# Altium PCB 底板20160428.PcbDoc (part 4 of 5)
Units mm, origin at the board's own origin, x right, y up, seen from the top; angles counter-clockwise.
Board outline 123.72 x 102.71 mm, 2 copper layers (Top Layer, Bottom Layer); 224 components, 227 nets, 768 pads, 282 vias.
Unrouted connection lines stored in the file: 2.
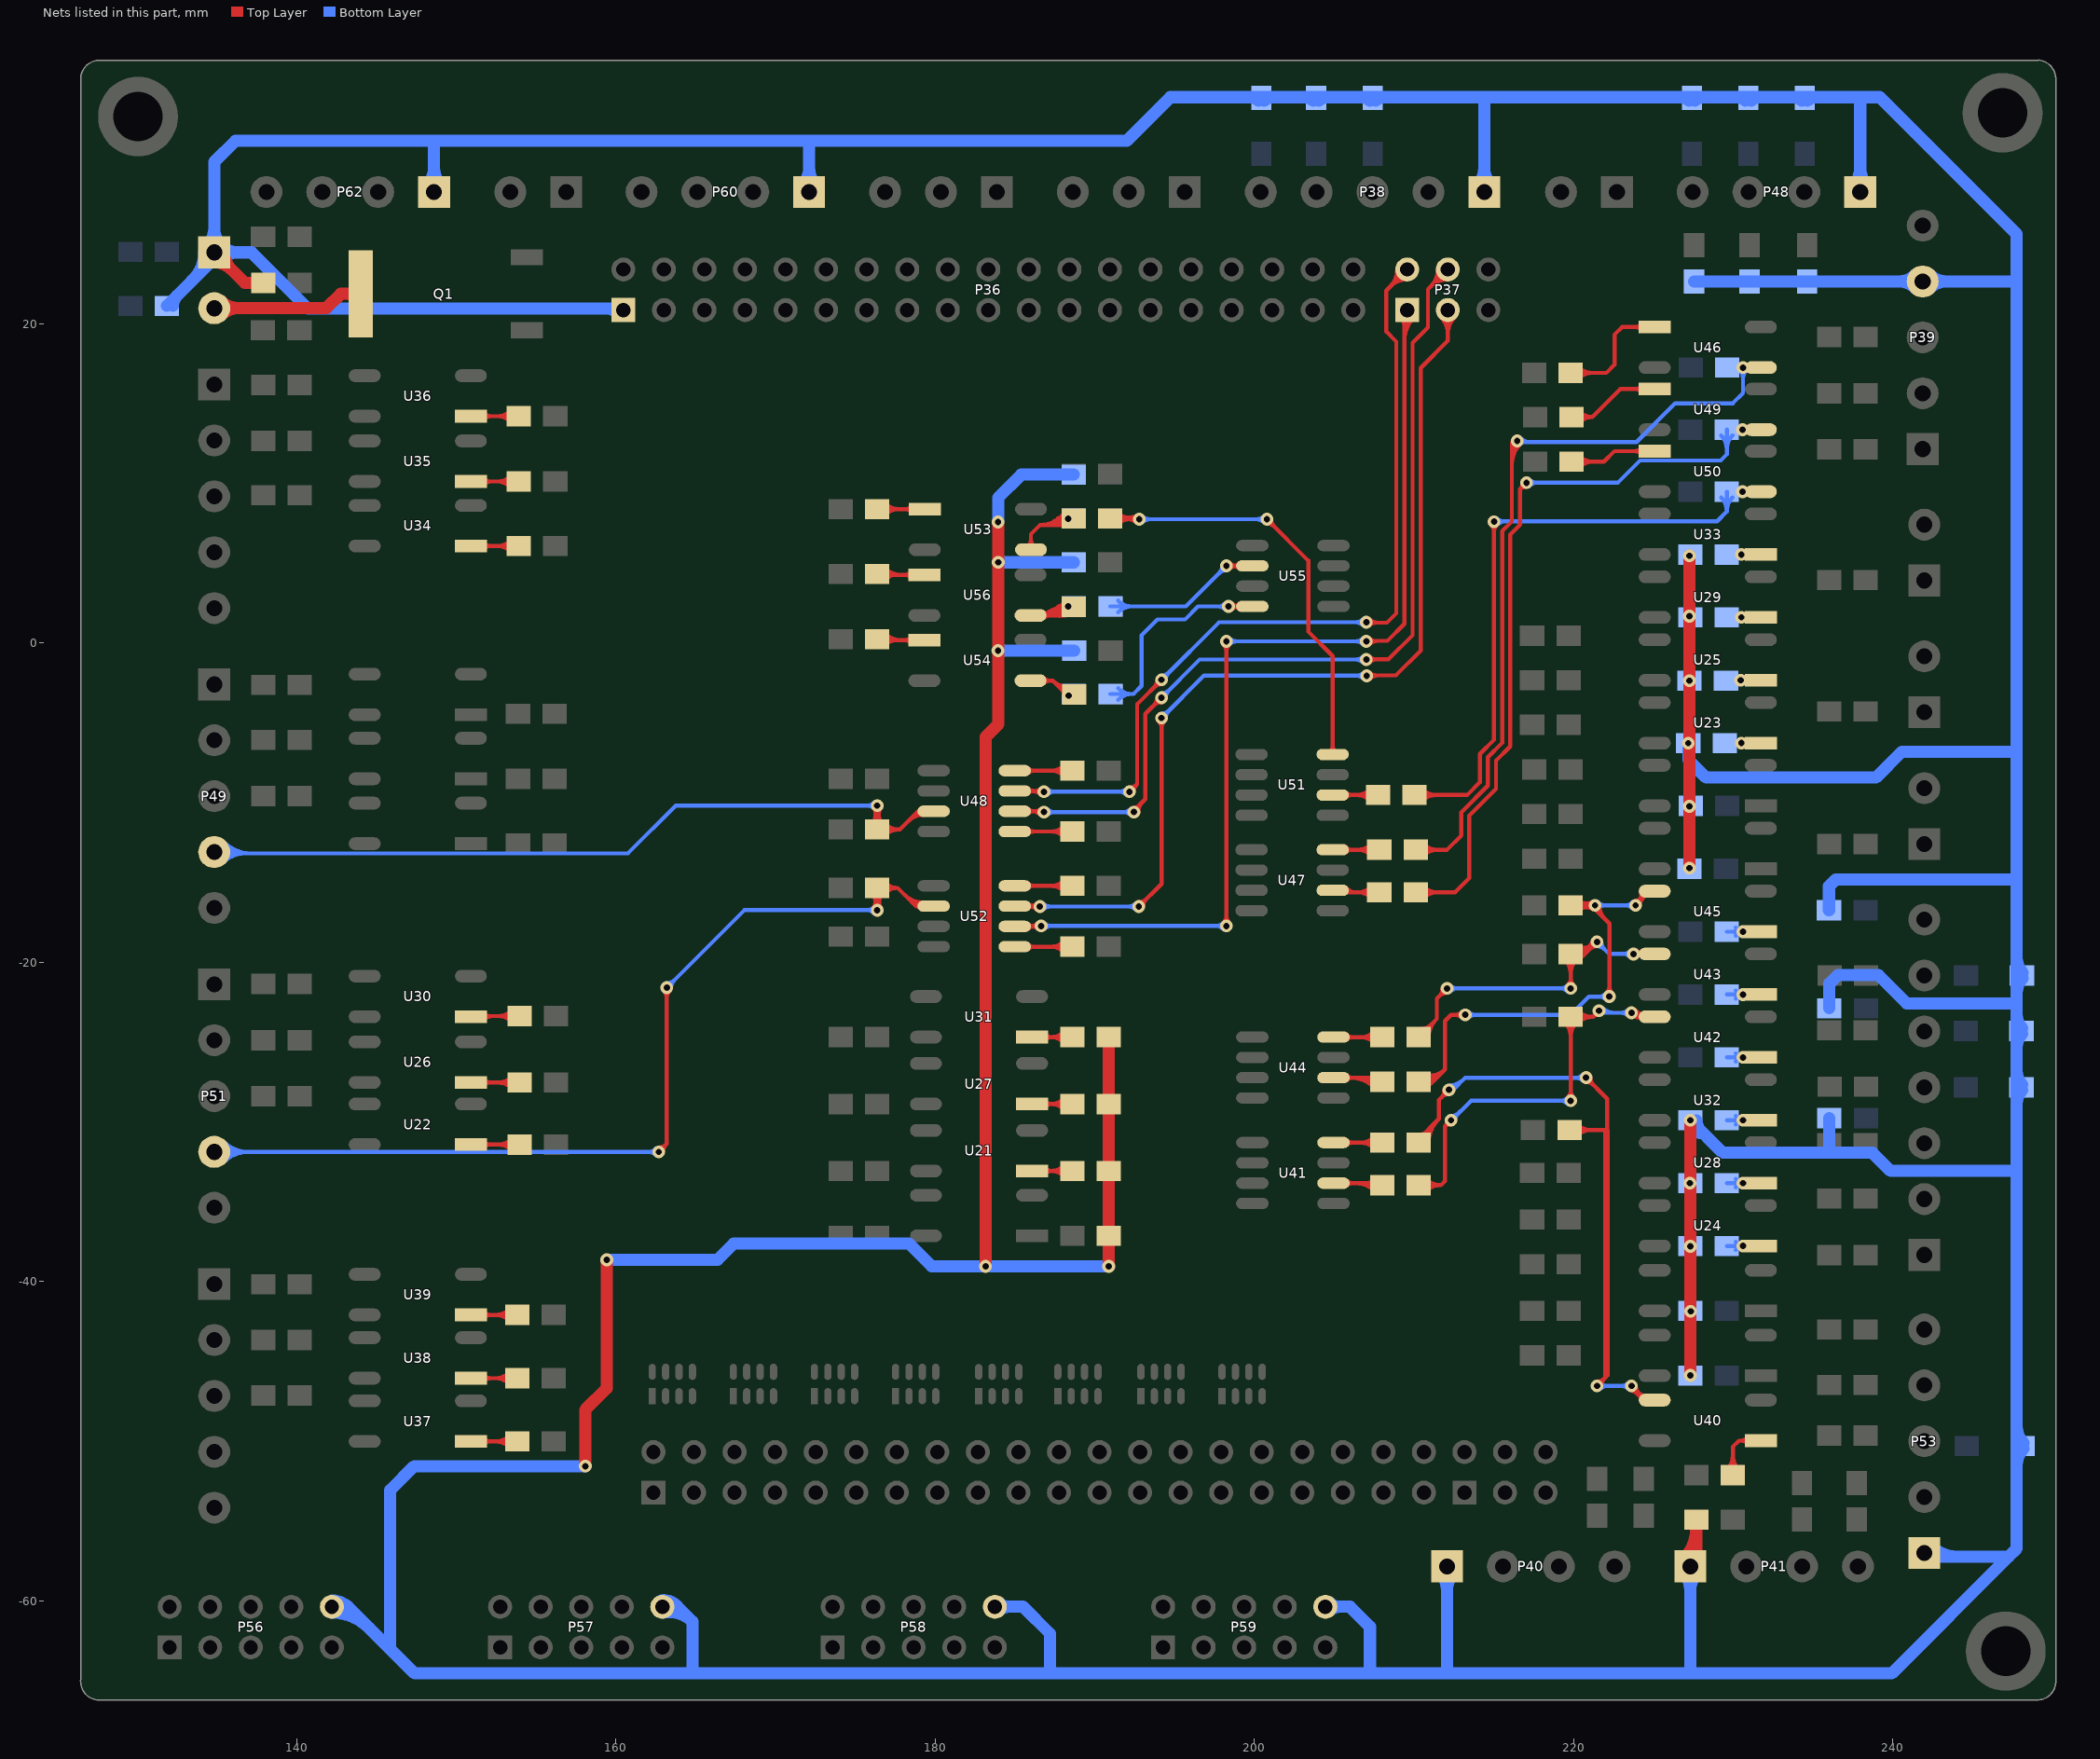
[diagram p4: the nets of this part, all layers, seen from the top]

## Via types
v1: diameter 0.8, hole 0.4, Top Layer to Bottom Layer, 282 vias

## Nets (pads, with @x,y where several pads share a name; then routed paths per layer and width w, separated by ;. In a path a pad name is that pad's centre, name@x,y a point inside that pad or via, vN(x,y) a via of type N, cw(c..) or ccw(c..) an arc to the next point about the centre after c; other vN are vias at no path point) (continued)
NetR56_1: R56.1 U21.1 | length 6.1
  Top Layer w0.254: U21.1@186.076,-33.07 186.077,-33.071 R56.1@189.205,-33.071 ; U21.1@186.869,-33.263 cw(c187.332,-33.726) 187.332,-33.071 ; U21.1@186.869,-32.877 ccw(c187.337,-32.408) 187.337,-33.071 ; R56.1@188.109,-33.43 ccw(c187.242,-34.297) 187.242,-33.071 ccw(c187.242,-31.844) R56.1@188.109,-32.712
NetR60_1: R60.1 U22.1 | length 6
  Top Layer w0.254: U22.1@150.923,-31.42 R60.1@153.975,-31.42 ; U22.1@151.715,-31.612 cw(c152.179,-32.075) 152.179,-31.42 ; U22.1@151.715,-31.226 ccw(c152.184,-30.757) 152.184,-31.42 ; R60.1@153.489,-31.779 ccw(c152.621,-32.646) 152.621,-31.42 ccw(c152.621,-30.193) R60.1@153.489,-31.061
NetR62_1: R62.1 U23.1 | length 3.2
  Top Layer w0.254: v1@230.699,-6.466 cw(c231.165,-6.932) 231.165,-6.273 cw(c231.165,-5.614) v1@230.699,-6.08 ; U23.1@230.922,-6.457 ccw(c230.506,-6.836) v1(230.506,-6.273) ; U23.1@230.922,-6.089 cw(c230.506,-5.709) v1(230.506,-6.273) ; U23.1@231.724,-6.273 v1(230.506,-6.273)
NetR63_1: R63.1 U24.1 | length 6.1
  Top Layer w0.254: U24.1@230.801,-37.962 cw(c231.267,-38.428) 231.267,-37.769 cw(c231.267,-37.11) U24.1@230.801,-37.576 ; U24.1@230.899,-37.923 ccw(c230.608,-38.121) v1(230.608,-37.769) ; U24.1@230.899,-37.615 cw(c230.608,-37.417) v1(230.608,-37.769) ; U24.1@231.796,-37.769 v1(230.608,-37.769)
  Bottom Layer w0.254: R63.1@229.591,-37.77 R63.1@229.591,-37.77 v1(230.608,-37.769) ; R63.1@230.155,-37.511 ccw(c230.608,-37.242) v1(230.608,-37.769) ; R63.1@230.155,-38.027 cw(c230.608,-38.293) v1(230.608,-37.769) ; v1@230.415,-37.962 ccw(c229.949,-38.428) 229.949,-37.769 ccw(c229.949,-37.11) v1@230.415,-37.576
NetR64_1: R64.1 U25.1 | length 3.1
  Top Layer w0.254: v1@230.505,-2.337 230.53,-2.337 v1@230.531,-2.336 ; v1@230.647,-2.53 cw(c231.116,-2.998) U25.1@231.116,-2.336 ; v1@230.647,-2.144 ccw(c231.111,-1.68) U25.1@231.111,-2.336 ; U25.1@230.917,-2.513 ccw(c230.531,-2.843) v1@230.531,-2.336 ; U25.1@230.917,-2.158 cw(c230.531,-1.829) v1@230.531,-2.336 ; U25.1@231.724,-2.336 v1@230.531,-2.336
  other v1: 230.454,-2.337
NetR68_1: R68.1 U26.1 | length 6
  Top Layer w0.254: U26.1@150.93,-27.534 R68.1@153.975,-27.534 ; U26.1@151.715,-27.719 cw(c152.162,-28.166) 152.162,-27.534 ; U26.1@151.715,-27.333 ccw(c152.2,-26.847) 152.2,-27.534 ; R68.1@153.489,-27.893 ccw(c152.621,-28.76) 152.621,-27.534 ccw(c152.621,-26.307) R68.1@153.489,-27.174
NetR70_1: R70.1 U27.1 | length 6.1
  Top Layer w0.254: U27.1@186.076,-28.879 186.077,-28.88 R70.1@189.205,-28.88 ; U27.1@186.869,-29.072 cw(c187.332,-29.535) 187.332,-28.88 ; U27.1@186.869,-28.686 ccw(c187.337,-28.217) 187.337,-28.88 ; R70.1@188.109,-29.239 ccw(c187.242,-30.106) 187.242,-28.88 ccw(c187.242,-27.653) R70.1@188.109,-28.521
NetR71_1: R71.1 U28.1 | length 6
  Top Layer w0.254: U28.1@230.801,-34.025 cw(c231.267,-34.491) 231.267,-33.832 cw(c231.267,-33.173) U28.1@230.801,-33.639 ; U28.1@230.899,-33.986 ccw(c230.608,-34.184) v1(230.608,-33.832) ; U28.1@230.899,-33.678 cw(c230.608,-33.48) v1(230.608,-33.832) ; U28.1@231.796,-33.832 v1(230.608,-33.832)
  Bottom Layer w0.254: R71.1@229.591,-33.833 v1(230.608,-33.832) ; R71.1@230.155,-33.574 ccw(c230.608,-33.305) v1(230.608,-33.832) ; R71.1@230.155,-34.09 cw(c230.608,-34.356) v1(230.608,-33.832) ; v1@230.415,-34.025 ccw(c229.949,-34.491) 229.949,-33.832 ccw(c229.949,-33.173) v1@230.415,-33.639
NetR72_1: R72.1 U29.1 | length 3.2
  Top Layer w0.254: v1@230.699,1.408 cw(c231.165,0.942) 231.165,1.601 cw(c231.165,2.26) v1@230.699,1.794 ; U29.1@230.922,1.417 ccw(c230.506,1.038) v1(230.506,1.601) ; U29.1@230.922,1.785 cw(c230.506,2.165) v1(230.506,1.601) ; U29.1@231.724,1.601 v1(230.506,1.601)
NetR76_1: R76.1 U30.1 | length 6
  Top Layer w0.254: U30.1@150.96,-23.368 R76.1@153.975,-23.368 ; U30.1@151.715,-23.599 cw(c152.273,-24.158) 152.273,-23.368 ; U30.1@151.715,-23.213 ccw(c152.089,-22.839) 152.089,-23.368 ; R76.1@153.489,-23.727 ccw(c152.621,-24.594) 152.621,-23.368 ccw(c152.621,-22.142) R76.1@153.489,-23.009
NetR78_1: R78.1 U31.1 | length 6
  Top Layer w0.254: U31.1@186.076,-24.688 186.077,-24.689 R78.1@189.078,-24.689 ; U31.1@186.869,-24.881 cw(c187.332,-25.344) 187.332,-24.689 ; U31.1@186.869,-24.495 ccw(c187.337,-24.026) 187.337,-24.689 ; R78.1@188.109,-25.048 ccw(c187.242,-25.915) 187.242,-24.689 ccw(c187.242,-23.462) R78.1@188.109,-24.33
NetR79_1: R79.1 U32.1 | length 6
  Top Layer w0.254: U32.1@230.801,-30.088 cw(c231.267,-30.554) 231.267,-29.895 cw(c231.267,-29.236) U32.1@230.801,-29.702 ; U32.1@230.899,-30.049 ccw(c230.608,-30.247) v1(230.608,-29.895) ; U32.1@230.899,-29.741 cw(c230.608,-29.543) v1(230.608,-29.895) ; U32.1@231.796,-29.895 v1(230.608,-29.895)
  Bottom Layer w0.254: R79.1@229.591,-29.896 v1(230.608,-29.895) ; R79.1@230.155,-29.637 ccw(c230.608,-29.368) v1(230.608,-29.895) ; R79.1@230.155,-30.153 cw(c230.608,-30.419) v1(230.608,-29.895) ; v1@230.415,-30.088 ccw(c229.949,-30.554) 229.949,-29.895 ccw(c229.949,-29.236) v1@230.415,-29.702
NetR80_1: R80.1 U33.1 | length 3.2
  Top Layer w0.254: v1@230.699,5.345 cw(c231.165,4.879) 231.165,5.538 cw(c231.165,6.197) v1@230.699,5.731 ; U33.1@230.922,5.354 ccw(c230.506,4.975) v1(230.506,5.538) ; U33.1@230.922,5.722 cw(c230.506,6.102) v1(230.506,5.538) ; U33.1@231.724,5.538 v1(230.506,5.538)
NetR84_1: R84.1 U34.1 | length 6
  Top Layer w0.254: U34.1@150.923,6.071 R84.1@153.924,6.071 ; U34.1@151.715,5.879 cw(c152.179,5.415) 152.179,6.071 ; U34.1@151.715,6.265 ccw(c152.184,6.733) 152.184,6.071 ; R84.1@153.438,5.711 ccw(c152.571,4.844) 152.571,6.071 ccw(c152.571,7.297) R84.1@153.438,6.43
NetR86_1: R86.1 U35.1 | length 6
  Top Layer w0.254: U35.1@150.923,10.109 R86.1@153.924,10.109 ; U35.1@151.715,9.917 cw(c152.179,9.454) 152.179,10.109 ; U35.1@151.715,10.303 ccw(c152.184,10.772) 152.184,10.109 ; R86.1@153.438,9.75 ccw(c152.571,8.883) 152.571,10.109 ccw(c152.571,11.336) R86.1@153.438,10.468
NetR88_1: R88.1 U36.1 | length 6
  Top Layer w0.254: U36.1@150.922,14.2 R88.1@153.924,14.199 ; U36.1@151.715,14.007 cw(c152.181,13.541) 152.181,14.2 cw(c152.181,14.859) U36.1@151.715,14.393 ; 152.568,14.2 cw(c152.568,12.97) R88.1@153.438,13.839 ; 152.573,14.2 ccw(c152.573,15.423) R88.1@153.438,14.558
NetR90_1: R90.1 U37.1 | length 5.9
  Top Layer w0.254: U37.1@150.923,-50.013 R90.1@153.822,-50.013 ; U37.1@151.715,-50.205 cw(c152.179,-50.668) 152.179,-50.013 ; U37.1@151.715,-49.819 ccw(c152.184,-49.35) 152.184,-50.013 ; R90.1@153.336,-50.372 ccw(c152.469,-51.239) 152.469,-50.013 ccw(c152.469,-48.786) R90.1@153.336,-49.653
NetR92_1: R92.1 U38.1 | length 5.9
  Top Layer w0.254: U38.1@150.926,-46.05 R92.1@153.822,-46.05 ; U38.1@151.715,-46.247 cw(c152.19,-46.722) 152.19,-46.05 ; U38.1@151.715,-45.861 ccw(c152.172,-45.403) 152.172,-46.05 ; R92.1@153.336,-46.409 ccw(c152.469,-47.277) 152.469,-46.05 ccw(c152.469,-44.824) R92.1@153.336,-45.691
NetR94_1: R94.1 U39.1 | length 5.9
  Top Layer w0.254: U39.1@150.923,-42.088 R94.1@153.822,-42.088 ; U39.1@151.715,-42.28 cw(c152.179,-42.743) 152.179,-42.088 ; U39.1@151.715,-41.894 ccw(c152.184,-41.425) 152.184,-42.088 ; R94.1@153.336,-42.447 ccw(c152.469,-43.314) 152.469,-42.088 ccw(c152.469,-40.861) R94.1@153.336,-41.729
NetR96_1: R96.1 U40.1 | length 6.7
  Top Layer w0.254: R96.1@229.612,-51.762 ccw(c228.745,-50.894) 229.972,-50.894 ccw(c231.198,-50.894) R96.1@230.331,-51.762 ; R96.1@229.972,-52.121 229.972,-50.343 230.354,-49.961 U40.1@231.796,-49.961 ; U40.1@230.931,-50.154 ccw(c230.465,-50.62) 230.465,-49.961 ccw(c230.465,-49.302) U40.1@230.931,-49.768
NetR98_2: R98.2 R99.2 U40.4 | length 71.1
  Top Layer w0.254: R98.2@210.287,-31.293 210.287,-31.082 211.557,-29.812 211.557,-28.626 v1(212.192,-27.991) ; R98.2@210.414,-30.785 ccw(c210.414,-30.373) R98.2@210.705,-30.664 ; R98.2@210.668,-31.293 cw(c212.095,-31.293) 211.086,-30.283 ; R98.2@210.922,-31.293 cw(c212.963,-31.293) 211.519,-29.85 ; v1@211.919,-27.991 cw(c211.26,-27.991) 211.726,-28.457 cw(c212.192,-28.923) v1@212.192,-28.264 ; R99.2@219.735,-30.505 222.117,-30.505 222.117,-45.879 221.99,-46.006 ; R99.2@220.222,-30.865 cw(c221.089,-31.732) 221.089,-30.505 cw(c221.089,-29.279) R99.2@220.222,-30.146 ; v1@220.777,-27.502 cw(c220.777,-28.161) 221.243,-27.695 cw(c221.709,-27.229) v1@221.05,-27.229 ; v1(220.777,-27.229) 222.098,-28.55 222.098,-30.505 ; v1(221.463,-46.533) 221.99,-46.006 ; v1@221.463,-46.26 ccw(c221.463,-45.601) 221.929,-46.067 ccw(c222.395,-46.533) v1@221.736,-46.533 ; 221.99,-30.505 221.99,-46.006 ; v1@223.555,-46.798 cw(c223.299,-47.822) U40.4@224.214,-47.294 ; v1@223.622,-46.806 cw(c223.622,-47.465) 224.088,-46.999 cw(c224.554,-46.533) v1@223.895,-46.533 ; v1(223.622,-46.533) 224.51,-47.421 U40.4@225.146,-47.421 ; v1@223.673,-46.801 cw(c223.735,-47.126) 224.021,-46.96 ; 223.983,-46.894 cw(c223.457,-47.421) U40.4@224.201,-47.421 ; 224.069,-46.98 ccw(c224.474,-46.574) U40.4@224.474,-47.148
  Bottom Layer w0.254: v1(212.192,-27.991) 212.446,-27.991 213.208,-27.229 v1(220.777,-27.229) ; v1@212.192,-27.972 ccw(c212.192,-27.313) 212.658,-27.779 ; v1@212.192,-27.718 ccw(c212.192,-26.446) 213.091,-27.345 ; v1@220.584,-27.422 ccw(c220.118,-27.888) 220.118,-27.229 ccw(c220.118,-26.57) v1@220.584,-27.036 ; v1(221.463,-46.533) v1(223.622,-46.533) ; v1@221.656,-46.726 cw(c222.122,-47.192) 222.122,-46.533 cw(c222.122,-45.874) v1@221.656,-46.34 ; v1@223.429,-46.726 ccw(c222.963,-47.192) 222.963,-46.533 ccw(c222.963,-45.874) v1@223.429,-46.34
NetR100_1: R100.1 U42.1 | length 6.1
  Top Layer w0.254: v1(230.608,-25.96) v1(230.608,-25.96) ; U42.1@230.801,-26.153 cw(c231.272,-26.624) U42.1@231.272,-25.958 ; U42.1@230.801,-25.767 ccw(c231.262,-25.306) U42.1@231.262,-25.958 ; U42.1@230.899,-26.112 ccw(c230.608,-26.31) v1(230.608,-25.96) ; U42.1@230.899,-25.804 cw(c230.608,-25.606) v1(230.608,-25.96) ; U42.1@231.796,-25.958 v1(230.608,-25.96)
  Bottom Layer w0.254: R100.1@229.591,-25.959 R100.1@229.591,-25.959 v1(230.608,-25.96) ; R100.1@230.155,-26.218 cw(c230.608,-26.486) v1(230.608,-25.96) ; R100.1@230.155,-25.701 ccw(c230.608,-25.435) v1(230.608,-25.96) ; v1@230.415,-26.153 ccw(c229.949,-26.619) 229.949,-25.96 ccw(c229.949,-25.301) v1@230.415,-25.767
NetR102_2: R102.2 R103.2 U42.4 | length 40.1
  Top Layer w0.254: R102.2@210.287,-33.96 211.684,-33.96 211.938,-33.706 211.938,-30.277 ; R102.2@210.773,-34.319 cw(c211.64,-35.186) 211.64,-33.96 cw(c211.64,-32.733) R102.2@210.773,-33.601 ; v1@212.049,-29.937 cw(c211.658,-29.997) 211.938,-30.277 ; v1@212.277,-30.166 ccw(c212.217,-30.556) 211.938,-30.277 ; v1(212.319,-29.896) 211.938,-30.277 ; R103.2@219.452,-23.778 cw(c218.585,-24.645) 219.812,-24.645 cw(c221.038,-24.645) R103.2@220.171,-23.778 ; v1@219.619,-28.484 ccw(c219.153,-28.018) 219.812,-28.018 ccw(c220.471,-28.018) v1@220.005,-28.484 ; v1(219.812,-28.677) R103.2@219.812,-23.419 221.209,-23.419 ; R103.2@220.298,-23.778 cw(c221.165,-24.645) 221.165,-23.419 cw(c221.165,-22.192) R103.2@220.298,-23.06 ; v1@221.32,-23.079 cw(c220.929,-23.139) 221.209,-23.419 ; v1@221.548,-23.308 ccw(c221.488,-23.698) 221.209,-23.419 ; v1(221.59,-23.038) 221.209,-23.419 ; v1(223.622,-23.165) v1@223.875,-23.418 ; v1@223.635,-23.151 ccw(c224.278,-22.508) U42.4@224.278,-23.418 ; v1@223.639,-23.158 ccw(c224.072,-22.991) 223.952,-23.438 ; v1@223.815,-22.972 ccw(c224.891,-21.895) U42.4@224.891,-23.418 ; U42.4@224.268,-23.597 ccw(c223.875,-23.94) v1@223.875,-23.418 ; U42.4@224.268,-23.239 cw(c223.875,-22.896) v1@223.875,-23.418 ; U42.4@225.145,-23.419 225.146,-23.418 v1@223.875,-23.418
  Bottom Layer w0.254: v1(212.319,-29.896) 212.351,-29.896 213.57,-28.677 v1(219.812,-28.677) ; v1@212.319,-29.623 ccw(c212.319,-28.885) 212.84,-29.407 ; v1@212.592,-29.896 cw(c213.172,-29.896) 212.762,-29.485 ; v1@219.619,-28.87 ccw(c219.153,-29.336) 219.153,-28.677 ccw(c219.153,-28.018) v1@219.619,-28.484 ; v1(221.59,-23.038) 221.717,-23.165 v1(223.622,-23.165) ; v1@221.783,-22.845 ccw(c222.555,-22.072) 222.555,-23.165 ; v1@223.429,-23.358 ccw(c222.963,-23.824) 222.963,-23.165 ccw(c222.963,-22.506) v1@223.429,-22.972
NetR104_1: R104.1 U43.1 | length 6
  Top Layer w0.254: v1(230.607,-22.022) v1(230.607,-22.022) ; U43.1@230.8,-22.215 cw(c231.268,-22.683) U43.1@231.268,-22.021 ; U43.1@230.8,-21.829 ccw(c231.263,-21.365) U43.1@231.263,-22.021 ; U43.1@230.899,-22.175 ccw(c230.608,-22.373) v1(230.607,-22.022) ; U43.1@230.899,-21.867 cw(c230.608,-21.669) v1(230.607,-22.022) ; U43.1@231.796,-22.021 v1(230.607,-22.022)
  Bottom Layer w0.254: R104.1@229.591,-22.022 v1(230.607,-22.022) ; R104.1@230.155,-22.28 cw(c230.607,-22.546) v1(230.607,-22.022) ; R104.1@230.155,-21.764 ccw(c230.607,-21.498) v1(230.607,-22.022) ; v1@230.414,-22.215 ccw(c229.948,-22.681) 229.948,-22.022 ccw(c229.948,-21.363) v1@230.414,-21.829
NetR107_2: R107.2 R108.2 U43.4 | length 41.2
  Top Layer w0.254: R107.2@210.414,-24.181 ccw(c210.414,-23.261) 211.064,-23.911 ; R107.2@210.668,-24.689 cw(c211.587,-24.689) 210.937,-24.038 ; R107.2@210.795,-24.689 R107.2@210.287,-24.689 211.43,-23.546 211.43,-22.276 v1(212.065,-21.641) ; R107.2@210.922,-24.689 cw(c212.455,-24.689) 211.371,-23.605 ; v1@211.792,-21.641 cw(c211.133,-21.641) 211.599,-22.107 cw(c212.065,-22.573) v1@212.065,-21.914 ; R108.2@219.452,-19.841 cw(c218.585,-20.708) 219.812,-20.708 cw(c221.038,-20.708) R108.2@220.171,-19.841 ; v1@219.619,-21.448 ccw(c219.153,-20.982) 219.812,-20.982 ccw(c220.471,-20.982) v1@220.005,-21.448 ; v1(219.812,-21.641) R108.2@219.812,-19.482 220.701,-19.482 ; R108.2@219.848,-19.719 ccw(c220.11,-19.031) 220.631,-19.552 ; R108.2@219.939,-19.482 ccw(c220.263,-18.63) 220.908,-19.274 ; R108.2@220.029,-19.244 ccw(c220.416,-18.228) v1@221.185,-18.997 ; R108.2@220.119,-19.007 ccw(c220.569,-17.827) v1(221.463,-18.72) 220.701,-19.482 ; R108.2@220.408,-19.677 cw(c220.701,-19.799) 220.701,-19.482 ; R108.2@220.408,-19.286 ccw(c220.701,-19.164) 220.701,-19.482 ; 220.73,-19.26 ccw(c220.227,-18.389) v1@221.199,-18.649 ; 221.155,-19.015 cw(c221.311,-19.285) v1@221.392,-18.983 ; v1@221.19,-18.72 cw(c220.531,-18.72) 220.997,-19.186 cw(c221.463,-19.652) v1@221.463,-18.993 ; v1@221.199,-18.651 cw(c220.573,-18.487) 220.896,-19.047 cw(c221.22,-19.607) v1@221.39,-18.983 ; v1@223.942,-19.675 cw(c224.41,-20.143) U43.4@224.41,-19.481 ; v1@223.942,-19.289 ccw(c224.405,-18.825) U43.4@224.405,-19.481 ; U43.4@224.268,-19.659 ccw(c223.877,-19.998) v1@223.877,-19.481 ; U43.4@224.268,-19.302 cw(c223.877,-18.963) v1@223.877,-19.481 ; U43.4@225.145,-19.482 225.146,-19.481 v1@223.877,-19.481
  Bottom Layer w0.254: v1(212.065,-21.641) v1(219.812,-21.641) ; v1@212.258,-21.834 cw(c212.724,-22.3) 212.724,-21.641 cw(c212.724,-20.982) v1@212.258,-21.448 ; v1@219.619,-21.834 ccw(c219.153,-22.3) 219.153,-21.641 ccw(c219.153,-20.982) v1@219.619,-21.448 ; v1@221.463,-18.993 cw(c221.463,-19.652) 221.929,-19.186 cw(c222.395,-18.72) v1@221.736,-18.72 ; v1(221.463,-18.72) 222.225,-19.482 v1(223.749,-19.482) ; v1@223.556,-19.675 ccw(c223.09,-20.141) 223.09,-19.482 ccw(c223.09,-18.823) v1@223.556,-19.289
NetR109_1: R109.1 U45.1 | length 6
  Top Layer w0.254: v1(230.607,-18.085) v1(230.607,-18.085) ; U45.1@230.8,-18.278 cw(c231.268,-18.746) U45.1@231.268,-18.084 ; U45.1@230.8,-17.892 ccw(c231.263,-17.428) U45.1@231.263,-18.084 ; U45.1@230.899,-18.238 ccw(c230.608,-18.436) v1(230.607,-18.085) ; U45.1@230.899,-17.93 cw(c230.608,-17.732) v1(230.607,-18.085) ; U45.1@231.796,-18.084 v1(230.607,-18.085)
  Bottom Layer w0.254: R109.1@229.591,-18.085 v1(230.607,-18.085) ; R109.1@230.155,-18.343 cw(c230.607,-18.609) v1(230.607,-18.085) ; R109.1@230.155,-17.827 ccw(c230.607,-17.561) v1(230.607,-18.085) ; v1@230.414,-18.278 ccw(c229.948,-18.744) 229.948,-18.085 ccw(c229.948,-17.426) v1@230.414,-17.892
NetR111_2: R111.2 R112.2 U45.4 | length 48.9
  Top Layer w0.254: R111.2@210.287,-27.483 211.176,-27.483 ; R111.2@210.323,-27.72 ccw(c210.585,-27.032) 211.106,-27.553 ; R111.2@210.414,-27.483 ccw(c210.738,-26.631) 211.383,-27.275 ; R111.2@210.504,-27.245 ccw(c210.891,-26.229) 211.66,-26.998 ; R111.2@210.594,-27.008 ccw(c211.044,-25.828) 211.938,-26.721 ; R111.2@210.883,-27.678 cw(c211.176,-27.8) 211.176,-27.483 ; R111.2@210.883,-27.287 ccw(c211.176,-27.165) 211.176,-27.483 ; v1@213.015,-23.485 ccw(c212.549,-23.951) 212.549,-23.292 ccw(c212.549,-22.633) v1@213.015,-23.099 ; v1(213.208,-23.292) 212.319,-23.292 211.938,-23.673 211.938,-26.721 ; R112.2@219.812,-16.434 v1(221.336,-16.434) 221.336,-16.668 222.244,-17.576 222.244,-21.914 v1@222.479,-22.149 ; R112.2@220.298,-16.793 cw(c221.165,-17.66) 221.165,-16.434 cw(c221.165,-15.207) R112.2@220.298,-16.075 ; 220.626,-16.578 cw(c220.809,-17.264) v1@221.189,-16.664 ; 220.626,-16.289 ccw(c220.809,-15.604) v1@221.189,-16.203 ; 220.791,-16.534 ccw(c220.659,-16.043) v1@221.099,-16.297 ; 220.791,-16.333 cw(c220.659,-16.824) v1@221.099,-16.57 ; v1@221.143,-16.627 ccw(c220.677,-17.093) 220.677,-16.434 ccw(c220.677,-15.775) v1@221.143,-16.241 ; v1@221.355,-16.434 ccw(c221.967,-16.434) 221.534,-16.867 ; v1@221.609,-16.434 ccw(c222.834,-16.434) 221.967,-17.3 ; v1@222.032,-21.956 ccw(c221.52,-21.444) 222.244,-21.444 ; 222.244,-21.536 ccw(c222.838,-21.536) v1@222.418,-21.956 ; v1@223.859,-16.161 ccw(c223.832,-15.722) 224.213,-15.942 ; v1@223.876,-16.161 ccw(c223.876,-15.502) 224.342,-15.968 ccw(c224.808,-16.434) v1@224.149,-16.434 ; v1@224.139,-16.363 cw(c224.623,-16.234) 224.189,-15.983 ; U45.4@224.208,-15.603 cw(c223.464,-15.768) 224.003,-16.307 224.766,-15.544 U45.4@225.146,-15.544 ; 224.33,-15.98 ccw(c224,-15.649) U45.4@224.456,-15.548 ; 211.176,-27.483 211.938,-26.721
  Bottom Layer w0.254: v1(213.208,-23.292) 219.812,-23.292 220.955,-22.149 v1@222.479,-22.149 ; v1@213.401,-23.485 cw(c213.867,-23.951) 213.867,-23.292 cw(c213.867,-22.633) v1@213.401,-23.099 ; v1(221.336,-16.434) v1(223.876,-16.434) ; v1@221.529,-16.627 cw(c221.995,-17.093) 221.995,-16.434 cw(c221.995,-15.775) v1@221.529,-16.241 ; v1@222.032,-22.342 ccw(c221.566,-22.808) 221.566,-22.149 ccw(c221.566,-21.49) v1@222.032,-21.956 ; v1@223.683,-16.627 ccw(c223.217,-17.093) 223.217,-16.434 ccw(c223.217,-15.775) v1@223.683,-16.241
  other v1: 222.225,-22.149
NetR113_1: R113.1 U46.1 | length 10.5
  Top Layer w0.254: R113.1@219.812,16.916 222.047,16.916 222.555,17.424 222.555,19.303 223.037,19.786 U46.1@225.074,19.786 ; R113.1@220.298,16.557 cw(c221.165,15.69) 221.165,16.916 cw(c221.165,18.143) R113.1@220.298,17.276 ; U46.1@224.281,19.593 ccw(c223.815,19.127) 223.815,19.786 ccw(c223.815,20.445) U46.1@224.281,19.979
NetR115_1: R115.1 U48.4 | length 6.4
  Top Layer w0.254: U48.4@184.988,-8.001 R115.1@188.595,-8.001 ; U48.4@185.81,-8.163 cw(c186.2,-8.553) 186.2,-8.001 cw(c186.2,-7.449) U48.4@185.81,-7.839 ; R115.1@188.109,-8.36 ccw(c187.242,-9.227) 187.242,-8.001 ccw(c187.242,-6.775) R115.1@188.109,-7.642
NetR116_2: R116.2 R118.2 U46.4 | length 56.6
  Top Layer w0.254: R116.2@210.109,-12.954 212.065,-12.954 212.954,-12.065 212.954,-10.61 214.63,-8.934 214.63,-7.156 215.519,-6.267 215.519,4.909 215.519,6.998 216.129,7.608 216.129,12.319 ; R116.2@210.595,-13.313 cw(c211.462,-14.18) 211.462,-12.954 cw(c211.462,-11.728) R116.2@210.595,-12.595 ; 216.129,11.193 cw(c217.915,11.193) v1@216.652,12.456 ; 216.129,11.806 cw(c217.302,11.806) v1@216.472,12.636 ; 216.129,12.419 cw(c216.689,12.419) v1@216.293,12.815 ; v1@216.196,12.576 cw(c215.943,12.505) 216.129,12.319 ; v1@216.385,12.386 ccw(c216.314,12.133) 216.129,12.319 ; v1(216.459,12.649) 216.129,12.319 ; U46.4@230.801,17.053 cw(c231.267,16.587) 231.267,17.246 cw(c231.267,17.905) U46.4@230.801,17.439 ; U46.4@230.899,17.092 ccw(c230.608,16.893) v1(230.608,17.246) ; U46.4@230.899,17.399 cw(c230.608,17.598) v1(230.608,17.246) ; U46.4@231.724,17.246 v1(230.608,17.246)
  Bottom Layer w0.254: v1(216.459,12.649) 216.53,12.578 223.932,12.578 226.365,15.011 229.972,15.011 230.608,15.647 v1(230.608,17.246) ; v1@216.652,12.456 cw(c216.947,12.161) 216.947,12.578 ; v1@216.652,12.842 ccw(c217.289,13.479) 217.289,12.578 ; v1@230.415,17.053 cw(c229.949,16.587) 230.608,16.587 cw(c231.267,16.587) v1@230.801,17.053
NetR119_1: R119.1 U49.1 | length 8.8
  Top Layer w0.254: R119.1@219.862,14.148 221.158,14.148 ; R119.1@220.361,13.801 cw(c221.158,13.058) 221.158,14.148 ; R119.1@220.361,14.494 ccw(c221.158,15.237) 221.158,14.148 ; U49.1@224.281,15.706 ccw(c223.815,15.24) 223.815,15.899 ccw(c223.815,16.558) U49.1@224.281,16.092 ; U49.1@225.074,15.899 222.909,15.899 221.158,14.148
NetR122_1: R122.1 U48.1 | length 6.4
  Top Layer w0.254: U48.1@184.988,-11.811 R122.1@188.595,-11.811 ; U48.1@185.81,-11.973 cw(c186.2,-12.363) 186.2,-11.811 cw(c186.2,-11.259) U48.1@185.81,-11.649 ; R122.1@188.109,-12.17 ccw(c187.242,-13.037) 187.242,-11.811 ccw(c187.242,-10.585) R122.1@188.109,-11.452
NetR123_2: R123.2 R124.2 U49.4 | length 53.4
  Top Layer w0.254: R123.2@210.109,-15.621 212.573,-15.621 213.462,-14.732 213.462,-10.82 215.138,-9.144 215.138,-7.366 216.027,-6.477 216.027,4.699 216.027,6.788 216.637,7.397 216.637,9.627 ; R123.2@210.595,-15.98 cw(c211.462,-16.847) 211.462,-15.621 cw(c211.462,-14.395) R123.2@210.595,-15.262 ; v1@216.771,10.005 cw(c216.305,9.958) 216.637,9.627 ; v1@217.015,9.761 ccw(c216.968,9.295) 216.637,9.627 ; v1(217.043,10.033) 216.637,9.627 ; U49.4@230.775,13.166 cw(c231.241,12.7) 231.241,13.359 cw(c231.241,14.018) U49.4@230.775,13.552 ; U49.4@230.905,13.197 ccw(c230.582,12.958) v1(230.582,13.359) ; U49.4@230.905,13.522 cw(c230.582,13.761) v1(230.582,13.359) ; U49.4@231.724,13.359 v1(230.582,13.359)
  Bottom Layer w0.254: v1(217.043,10.033) 222.758,10.033 224.155,11.43 229.21,11.43 229.591,11.811 R124.2@229.591,13.36 ; v1@217.236,9.84 cw(c217.702,9.374) 217.702,10.033 cw(c217.702,10.692) v1@217.236,10.226 ; R124.2@229.231,13.001 cw(c228.364,12.134) 229.591,12.134 cw(c230.817,12.134) R124.2@229.95,13.001
NetR125_1: R125.1 U50.1 | length 8.4
  Top Layer w0.254: R125.1@219.862,11.354 221.894,11.354 222.554,12.013 U50.1@225.074,12.013 ; R125.1@220.349,10.995 cw(c221.216,10.127) 221.216,11.354 cw(c221.216,12.58) R125.1@220.349,11.713 ; U50.1@224.281,11.82 ccw(c223.815,11.354) 223.815,12.013 ccw(c223.815,12.672) U50.1@224.281,12.206
NetR127_2: R127.2 R128.2 U50.4 | length 46
  Top Layer w0.254: R127.2@210.033,-9.525 213.32,-9.525 214.122,-8.723 214.122,-6.945 215.011,-6.056 v1(215.011,7.595) ; R127.2@210.519,-9.884 cw(c211.386,-10.751) 211.386,-9.525 cw(c211.386,-8.299) R127.2@210.519,-9.166 ; v1@214.818,7.402 cw(c214.352,6.936) 215.011,6.936 cw(c215.67,6.936) v1@215.204,7.402 ; U50.4@230.775,9.28 cw(c231.241,8.814) 231.241,9.473 cw(c231.241,10.132) U50.4@230.775,9.666 ; U50.4@230.905,9.311 ccw(c230.582,9.072) v1(230.582,9.473) ; U50.4@230.905,9.636 cw(c230.582,9.875) v1(230.582,9.473) ; U50.4@231.724,9.473 v1(230.582,9.473)
  Bottom Layer w0.254: v1@215.011,7.62 228.981,7.62 229.591,8.23 R128.2@229.591,9.474 ; v1@215.204,7.402 cw(c215.731,6.874) 215.731,7.62 ; v1@215.204,7.788 ccw(c215.609,8.192) 215.609,7.62 ; R128.2@229.231,9.115 cw(c228.364,8.248) 229.591,8.248 cw(c230.817,8.248) R128.2@229.95,9.115
NetR129_1: R129.1 U52.4 | length 6.4
  Top Layer w0.254: U52.4@184.988,-15.215 R129.1@188.595,-15.215 ; U52.4@185.81,-15.376 cw(c186.2,-15.766) 186.2,-15.215 cw(c186.2,-14.663) U52.4@185.81,-15.053 ; R129.1@188.109,-15.574 ccw(c187.242,-16.441) 187.242,-15.215 ccw(c187.242,-13.988) R129.1@188.109,-14.855
NetR130_1: R130.1 U53.1 | length 5.9
  Top Layer w0.254: R130.1@176.378,8.382 U53.1@179.354,8.381 ; R130.1@176.864,8.023 cw(c177.729,7.158) 177.729,8.381 ; R130.1@176.864,8.741 ccw(c177.733,9.611) 177.733,8.381 ; U53.1@178.561,8.188 ccw(c178.095,7.722) 178.095,8.381 ccw(c178.095,9.04) U53.1@178.561,8.574
NetR133_2: R133.2 R135.2 U53.4 | length 15
  Top Layer w0.254: U53.4@185.811,6.034 ccw(c185.345,6.5) 186.004,6.5 ccw(c186.663,6.5) U53.4@186.197,6.034 ; U53.4@186.004,5.841 186.004,6.807 186.588,7.391 ; 186.762,7.391 ccw(c186.762,9.351) R133.2@188.148,7.965 ; 187.134,7.391 ccw(c187.134,8.99) R133.2@188.358,7.961 ; 187.375,7.391 ccw(c187.375,8.738) R133.2@188.328,7.786 ; 187.408,7.597 cw(c187.765,7.086) R133.2@188.166,7.563 ; 187.679,7.391 ccw(c187.679,8.532) R133.2@188.552,7.798 ; 187.679,7.787 cw(c187.985,7.348) R133.2@188.329,7.758 ; 187.723,7.518 cw(c187.978,7.153) R133.2@188.203,7.537 ; R133.2@187.951,7.976 cw(c188.206,7.611) R133.2@188.492,7.952 ; R133.2@187.989,7.391 ccw(c187.989,8.125) R133.2@188.507,7.606 ; R133.2@188.038,7.439 ccw(c187.94,7.58) R133.2@188.095,7.654 ; R133.2@188.056,7.451 cw(c188.238,7.191) R133.2@188.293,7.504 ; R133.2@188.163,8.125 cw(c186.588,9.449) 186.588,7.391 ; R133.2@188.273,7.391 186.588,7.391
  other v1: 188.341,7.772
NetR136_1: R136.1 U52.1 | length 6.4
  Top Layer w0.254: U52.1@184.988,-19.025 R136.1@188.595,-19.025 ; U52.1@185.81,-19.186 cw(c186.2,-19.576) 186.2,-19.025 cw(c186.2,-18.473) U52.1@185.81,-18.863 ; R136.1@188.109,-19.384 ccw(c187.242,-20.251) 187.242,-19.025 ccw(c187.242,-17.798) R136.1@188.109,-18.665
NetR137_1: R137.1 U54.1 | length 6.5
  Top Layer w0.254: R137.1@176.429,0.177 U54.1@179.329,0.177 ; R137.1@176.684,0.408 ccw(c177.243,0.967) 177.243,0.177 ; R137.1@176.864,-0.131 cw(c177.606,-0.873) 177.606,0.177 ; R137.1@176.864,0.588 ccw(c177.856,1.58) 177.856,0.177 ; U54.1@178.536,-0.016 ccw(c178.07,-0.482) 178.07,0.177 ccw(c178.07,0.836) U54.1@178.536,0.37
NetR139_2: R139.2 R140.2 U54.4 | length 8.1
  Top Layer w0.254: U54.4@185.979,-2.363 187.377,-2.363 ; U54.4@186.772,-2.556 cw(c187.238,-3.022) 187.238,-2.363 cw(c187.238,-1.704) U54.4@186.772,-2.17 ; 187.725,-2.711 ccw(c188.395,-2.041) R140.2@188.553,-2.975 ; 187.814,-2.8 ccw(c188.366,-2.247) R140.2@188.366,-3.029 ; 187.936,-2.923 cw(c187.557,-3.302) R140.2@188.093,-3.302 ; R140.2@187.979,-2.966 cw(c187.719,-3.226) R140.2@188.087,-3.226 ; R140.2@188.14,-2.936 cw(c188.083,-3.536) R140.2@188.547,-3.152 ; R140.2@188.51,-2.725 cw(c188.294,-1.446) 187.377,-2.363 ; R140.2@188.722,-3.226 188.239,-3.226 187.377,-2.363
  other v1: 188.366,-3.302
NetR141_1: R141.1 U56.1 | length 6.5
  Top Layer w0.254: R141.1@176.429,4.266 U56.1@179.329,4.266 ; R141.1@176.684,4.498 ccw(c177.243,5.056) 177.243,4.266 ; R141.1@176.864,3.959 cw(c177.606,3.217) 177.606,4.266 ; R141.1@176.864,4.677 ccw(c177.856,5.67) 177.856,4.266 ; U56.1@178.536,4.073 ccw(c178.07,3.607) 178.07,4.266 ccw(c178.07,4.925) U56.1@178.536,4.459
NetR143_2: R143.2 R144.2 U56.4 | length 17.2
  Top Layer w0.254: U56.4@185.979,1.726 188.162,1.726 R144.2@188.697,2.261 ; U56.4@186.053,1.726 ccw(c186.053,4.777) R144.2@188.21,2.62 ; U56.4@186.666,1.726 ccw(c186.666,4.164) R144.2@188.39,2.44 ; U56.4@186.725,1.957 ccw(c187.111,2.57) 187.271,1.863 ; U56.4@186.772,1.533 cw(c187.238,1.067) 187.238,1.726 cw(c187.238,2.385) U56.4@186.772,1.919 ; U56.4@186.81,1.58 cw(c187.311,1.264) 187.181,1.842 ; U56.4@186.815,1.59 cw(c187.788,1.028) 187.498,2.113 ; 187.279,1.726 ccw(c187.279,3.551) R144.2@188.57,2.261 ; 187.396,2.062 cw(c187.79,1.487) R144.2@188.186,2.061 ; 187.488,1.919 cw(c188.003,1.026) R144.2@188.27,2.022 ; 187.684,1.749 ccw(c187.289,2.433) R144.2@188.071,2.324 ; 187.701,2.271 cw(c188.015,1.813) R144.2@188.33,2.27 ; 187.813,1.699 ccw(c187.57,2.424) R144.2@188.322,2.289 ; 187.893,1.726 ccw(c187.893,2.938) R144.2@188.749,2.081 ; R144.2@187.944,2.183 ccw(c187.8,2.431) R144.2@188.077,2.357 ; R144.2@188.22,1.836 ccw(c188.051,2.338) R144.2@188.572,2.245
  other v1: 188.341,2.286
O13: R98.1 U41.4 | length 5.8
  Top Layer w0.254: U41.4@204.946,-31.3 R98.1@207.993,-31.3 ; U41.4@205.775,-31.454 cw(c206.146,-31.826) 206.146,-31.3 ; U41.4@205.775,-31.131 ccw(c206.183,-30.723) 206.183,-31.3 ; 206.629,-31.3 ccw(c206.629,-30.048) R98.1@207.514,-30.934 ; 206.666,-31.3 cw(c206.666,-32.501) R98.1@207.514,-31.652
O14: R102.1 U41.2 | length 6.5
  Top Layer w0.254: U41.2@204.946,-33.84 R102.1@207.881,-33.84 ; U41.2@205.775,-33.994 cw(c206.146,-34.366) 206.146,-33.84 ; U41.2@205.775,-33.671 ccw(c206.183,-33.263) 206.183,-33.84 ; 206.359,-33.84 cw(c206.359,-35.474) R102.1@207.514,-34.319 ; 206.935,-33.84 ccw(c206.935,-33.022) R102.1@207.514,-33.601 ; 206.972,-33.84 cw(c206.972,-34.861) R102.1@207.694,-34.139
O15: R107.1 U44.4 | length 5.8
  Top Layer w0.254: U44.4@204.946,-24.696 R107.1@207.993,-24.696 ; U44.4@205.775,-24.85 cw(c206.146,-25.222) 206.146,-24.696 ; U44.4@205.775,-24.527 ccw(c206.183,-24.119) 206.183,-24.696 ; 206.629,-24.696 ccw(c206.629,-23.444) R107.1@207.514,-24.33 ; 206.666,-24.696 cw(c206.666,-25.897) R107.1@207.514,-25.048
O16: R111.1 U44.2 | length 7.4
  Top Layer w0.254: U44.2@204.946,-27.236 R111.1@207.754,-27.236 ; U44.2@205.775,-27.39 cw(c206.146,-27.762) 206.146,-27.236 ; U44.2@205.775,-27.067 ccw(c206.183,-26.659) 206.183,-27.236 ; 206.052,-27.236 cw(c206.052,-29.304) R111.1@207.514,-27.842 ; 206.666,-27.236 cw(c206.666,-28.691) R111.1@207.694,-27.662 ; R111.1@207.242,-27.236 ccw(c207.242,-26.851) R111.1@207.514,-27.124 ; R111.1@207.279,-27.236 cw(c207.279,-28.078) R111.1@207.874,-27.483
O17: R116.1 U47.4 | length 5.7
  Top Layer w0.254: U47.4@204.902,-12.954 R116.1@207.823,-12.954 ; U47.4@205.724,-13.116 cw(c206.114,-13.506) 206.114,-12.954 cw(c206.114,-12.402) U47.4@205.724,-12.792 ; R116.1@207.337,-13.313 ccw(c206.469,-14.18) 206.469,-12.954 ccw(c206.469,-11.728) R116.1@207.337,-12.595
O18: R123.1 U47.2 | length 5.7
  Top Layer w0.254: U47.2@204.902,-15.494 205.029,-15.621 R123.1@207.823,-15.621 ; U47.2@205.724,-15.332 ccw(c206.421,-14.636) 206.421,-15.621 ; R123.1@207.337,-15.98 ccw(c206.469,-16.847) 206.469,-15.621 ccw(c206.469,-14.395) R123.1@207.337,-15.262
O19: R127.1 U51.2 | length 5.6
  Top Layer w0.254: U51.2@204.902,-9.525 R127.1@207.747,-9.525 ; U51.2@205.724,-9.687 cw(c206.114,-10.077) 206.114,-9.525 cw(c206.114,-8.973) U51.2@205.724,-9.363 ; R127.1@207.26,-9.884 ccw(c206.393,-10.751) 206.393,-9.525 ccw(c206.393,-8.299) R127.1@207.26,-9.166
O20: R133.1 U51.4 | length 34.9
  Top Layer w0.254: R133.1@190.965,7.798 191.016,7.747 v1(192.786,7.747) ; R133.1@191.272,7.977 ccw(c191.828,8.534) 191.828,7.747 ; R133.1@191.451,7.439 cw(c192.196,6.694) 192.196,7.747 ; R133.1@191.451,8.157 ccw(c192.441,9.147) v1@192.441,7.747 ; 191.918,7.887 ccw(c192.168,8.818) v1@192.65,7.983 ; 192.334,7.776 cw(c192.243,7.433) v1@192.55,7.611 ; v1@192.593,7.554 ccw(c192.127,7.088) 192.127,7.747 ccw(c192.127,8.406) v1@192.593,7.94 ; v1@200.787,7.474 cw(c200.787,6.815) 201.253,7.281 cw(c201.719,7.747) v1@201.06,7.747 ; v1(200.787,7.747) 203.378,5.156 203.378,0.711 204.902,-0.813 U51.4@204.902,-6.985 ; U51.4@204.74,-6.823 ccw(c204.35,-6.433) 204.902,-6.433 ccw(c205.454,-6.433) U51.4@205.063,-6.823
  Bottom Layer w0.254: v1(192.786,7.747) v1(200.787,7.747) ; v1@192.979,7.554 cw(c193.445,7.088) 193.445,7.747 cw(c193.445,8.406) v1@192.979,7.94 ; v1@200.594,7.554 ccw(c200.128,7.088) 200.128,7.747 ccw(c200.128,8.406) v1@200.594,7.94
O21: R139.1 U55.4 | length 18.9
  Top Layer w0.254: v1(198.374,2.286) U55.4@199.873,2.286 ; v1@198.567,2.093 cw(c199.033,1.627) 199.033,2.286 cw(c199.033,2.945) v1@198.567,2.479 ; v1@198.616,2.159 cw(c198.768,2.079) 198.812,2.245 cw(c198.89,2.535) v1@198.62,2.405 ; v1@198.616,2.413 ccw(c198.768,2.493) 198.812,2.327 ccw(c198.89,2.037) v1@198.62,2.167 ; U55.4@199.051,2.124 ccw(c198.66,1.734) 198.66,2.286 ccw(c198.66,2.838) U55.4@199.051,2.448
  Bottom Layer w0.254: R139.1@190.983,-3.2 192.43,-3.2 192.938,-2.692 192.938,0.483 193.929,1.473 195.656,1.473 196.469,2.286 v1(198.374,2.286) ; R139.1@191.469,-3.56 cw(c192.336,-4.427) 192.336,-3.2 cw(c192.336,-1.974) R139.1@191.469,-2.841 ; v1@198.181,2.093 ccw(c197.715,1.627) 197.715,2.286 ccw(c197.715,2.945) v1@198.181,2.479
O22: R143.1 U55.2 | length 14.8
  Top Layer w0.254: v1(198.247,4.826) U55.2@199.873,4.826 ; v1@198.44,4.633 cw(c198.906,4.167) 198.906,4.826 cw(c198.906,5.485) v1@198.44,5.019 ; U55.2@199.051,4.664 ccw(c198.66,4.274) 198.66,4.826 ccw(c198.66,5.378) U55.2@199.051,4.988
  Bottom Layer w0.254: R143.1@190.983,2.286 195.707,2.286 v1(198.247,4.826) ; R143.1@191.469,1.927 cw(c192.336,1.06) 192.336,2.286 cw(c192.336,3.512) R143.1@191.469,2.645 ; v1@197.974,4.826 cw(c197.315,4.826) 197.781,4.36 cw(c198.247,3.894) v1@198.247,4.553
PW_GND: J4.2 Q1.2 | length 13.3
  Top Layer w0.762: J4.2@134.849,20.96 134.869,20.98 141.884,20.98 142.773,21.869 Q1.2@144.018,21.869 ; J4.2@135.286,20.522 cw(c136.392,19.417) 136.392,20.98 ; J4.2@135.286,21.398 ccw(c136.294,22.406) 136.294,20.98 ; Q1.2@143.757,21.608 ccw(c143.127,20.979) 143.127,21.869 ccw(c143.127,22.76) Q1.2@143.757,22.13
PW_VCC: D44.2 D45.2 D46.2 D47.2 D48.2 D50.2 D52.2 D53.2 D55.2 D56.2 J4.1 P36.1 P38.1 P39.4 P40.1 P41.1 P48.1 P53.1 P56.10 P57.10 P58.10 P59.10 P60.1 P62.1 R2.2 R46.2 R47.2 R48.2 R52.2 R55.2 R56.2 R62.2 R63.2 R64.2 R70.2 R71.2 R72.2 R78.2 R79.2 R80.2 R97.2 R101.2 R105.2 R106.1 R110.2 R114.2 R120.2 R126.2 R131.2 R138.2 R142.2 | length 749.1
  Top Layer w0.762: J4.1@134.849,23.841 cw(c134.849,22.347) 135.905,23.403 cw(c136.962,24.46) J4.1@135.468,24.46 ; J4.1@134.849,24.46 136.754,22.555 R106.1@137.922,22.555 ; v1(158.09,-51.562) 158.09,-48.031 159.436,-46.685 v1(159.436,-38.633) ; v1(183.159,-39.04) 183.159,-5.893 183.947,-5.105 v1(183.947,-0.483) v1@183.947,7.518 ; v1(190.881,-39.04) R48.2@190.881,-37.135 R56.2@190.881,-33.071 R70.2@190.881,-28.88 R78.2@190.881,-24.689 ; P41.1@226.867,-57.398 ccw(c224.89,-55.422) R97.2@227.686,-55.422 ; v1(227.254,-14.097) v1(227.254,-10.236) v1(227.254,-2.362) v1(227.254,1.676) v1(227.254,5.461) ; v1(227.305,-45.872) v1(227.305,-37.795) v1(227.305,-29.896) ; P41.1@227.686,-57.455 R97.2@227.686,-54.915
  Bottom Layer w0.762: R2.2@131.877,21.107 134.849,24.079 J4.1@134.849,24.46 ; R2.2@132.258,21.107 cw(c133.178,21.107) 132.527,21.758 ; 133.522,22.753 ccw(c131.815,24.46) J4.1@134.23,24.46 ; J4.1@134.411,24.898 ccw(c133.354,25.955) 134.849,25.955 ccw(c136.343,25.955) 135.286,24.898 ccw(c136.343,25.955) 136.343,24.46 ccw(c136.343,22.966) J4.1@135.286,24.022 ; P56.10@142.215,-60.735 cw(c142.215,-64.054) 144.562,-61.707 ; P56.10@142.215,-60.366 143.221,-60.366 145.872,-63.017 ; P56.10@142.215,-59.973 cw(c142.215,-61.453) 143.261,-60.406 ; P56.10@142.476,-60.627 cw(c143.105,-61.257) 143.105,-60.366 cw(c143.105,-59.475) P56.10@142.476,-60.105 ; P62.1@148.178,28.682 ccw(c147.121,29.739) 148.615,29.739 ccw(c150.11,29.739) P62.1@149.053,28.682 ; P62.1@148.615,28.245 148.615,31.445 ; v1(158.09,-51.562) 147.371,-51.562 145.872,-53.061 145.872,-63.017 ; 159.354,20.95 cw(c159.354,19.73) P36.1@160.216,20.592 ; v1(159.436,-38.633) 166.37,-38.633 167.386,-37.617 178.359,-37.617 179.781,-39.04 v1(190.881,-39.04) ; P36.1@160.477,20.853 160.381,20.95 140.696,20.95 137.185,24.46 J4.1@134.849,24.46 ; P57.10@162.844,-59.979 cw(c163.035,-61.005) 163.772,-60.267 ; P57.10@162.916,-60.366 163.871,-60.366 164.795,-61.29 ; P57.10@162.983,-60.729 cw(c163.356,-62.729) 164.795,-61.29 ; P57.10@163.177,-60.627 cw(c163.806,-61.257) 163.806,-60.366 cw(c163.806,-59.475) P57.10@163.177,-60.105 ; P60.1@171.673,28.682 ccw(c170.616,29.739) 172.11,29.739 ccw(c173.605,29.739) P60.1@172.548,28.682 ; P60.1@172.11,28.245 172.11,31.394 ; P58.10@183.744,-60.366 185.512,-60.366 187.198,-62.052 187.198,-64.541 ; v1@183.915,-0.489 R138.2@188.704,-0.489 ; v1(183.947,7.569) 183.947,9.093 185.395,10.541 R131.2@188.679,10.541 ; v1(183.954,5.048) R142.2@188.679,5.048 ; P58.10@184.005,-60.627 cw(c184.634,-61.257) 184.634,-60.366 cw(c184.634,-59.475) P58.10@184.005,-60.105 ; 199.696,34.183 cw(c199.696,33.397) D47.2@200.252,33.953 ; D47.2@200.611,33.953 cw(c201.167,33.397) 201.167,34.183 ; 203.125,34.183 cw(c203.125,33.397) D45.2@203.681,33.953 ; D45.2@204.04,33.953 cw(c204.596,33.397) 204.596,34.183 ; P59.10@204.445,-60.366 205.984,-60.366 207.239,-61.62 207.239,-64.541 ; P59.10@204.706,-60.627 cw(c205.335,-61.257) 205.335,-60.366 cw(c205.335,-59.475) P59.10@204.706,-60.105 ; 206.681,34.183 cw(c206.681,33.397) D44.2@207.237,33.953 ; D44.2@207.596,33.953 cw(c208.152,33.397) 208.152,34.183 ; P40.1@211.627,-58.273 cw(c210.57,-59.33) 212.065,-59.33 cw(c213.559,-59.33) P40.1@212.502,-58.273 ; 212.065,-64.44 P40.1@212.065,-57.836 ; P38.1@213.964,28.682 ccw(c212.907,29.739) 214.401,29.739 ccw(c215.896,29.739) P38.1@214.839,28.682 ; P38.1@214.401,28.245 214.401,34.107 ; 226.67,34.183 cw(c226.67,33.397) D50.2@227.227,33.953 ; P41.1@226.867,-58.273 cw(c225.81,-59.33) 227.305,-59.33 cw(c228.799,-59.33) P41.1@227.742,-58.273 ; v1(227.178,-6.274) 227.178,-7.315 228.295,-8.433 238.938,-8.433 240.563,-6.807 247.752,-6.807 ; R79.2@227.295,-29.912 cw(c226.644,-31.04) 227.902,-30.703 ; 227.305,-64.465 P41.1@227.305,-57.836 ; v1(227.305,-29.896) 227.305,-29.905 229.328,-31.928 238.709,-31.928 239.852,-33.071 247.701,-33.071 ; R114.2@227.54,22.639 R120.2@231.02,22.639 R126.2@234.627,22.639 247.744,22.639 ; D50.2@227.586,33.953 cw(c228.142,33.397) 228.142,34.183 ; R79.2@227.686,-29.896 ccw(c228.627,-29.896) 227.961,-30.562 ; 230.201,34.183 cw(c230.201,33.397) D48.2@230.757,33.953 ; D48.2@231.116,33.953 cw(c231.673,33.397) 231.673,34.183 ; 233.732,34.183 cw(c233.732,33.397) D46.2@234.288,33.953 ; D46.2@234.647,33.953 cw(c235.203,33.397) 235.203,34.183 ; R110.2@235.991,-16.739 235.991,-15.24 236.423,-14.808 247.752,-14.808 ; 236.017,-31.902 R101.2@236.017,-29.769 ; R105.2@236.017,-22.885 236.017,-21.336 236.55,-20.803 239.09,-20.803 240.868,-22.581 247.752,-22.581 ; P48.1@237.51,28.682 ccw(c236.453,29.739) 237.947,29.739 ccw(c239.442,29.739) P48.1@238.385,28.682 ; P48.1@237.947,28.245 237.947,34.132 ; 240.36,22.639 ccw(c240.36,24.14) P39.4@241.421,23.079 ; 240.369,22.639 cw(c240.369,21.151) P39.4@241.421,22.204 ; P53.1@241.96,-57.226 247.244,-57.226 ; P39.4@242.296,22.204 cw(c243.349,21.151) 243.349,22.639 ; P39.4@242.296,23.079 ccw(c243.358,24.14) 243.358,22.639 ; P53.1@242.398,-56.56 ccw(c244.007,-54.951) 244.007,-57.226 ; 247.752,-51.506 cw(c249.214,-51.506) D56.2@248.18,-50.472 ; 247.752,-49.078 ccw(c249.214,-49.078) D56.2@248.18,-50.112 ; 247.752,-28.868 cw(c248.954,-28.868) D52.2@248.104,-28.018 ; 247.752,-26.808 ccw(c248.954,-26.808) D52.2@248.104,-27.659 ; 247.752,-25.338 cw(c248.954,-25.338) D53.2@248.104,-24.487 ; 247.752,-23.278 ccw(c248.954,-23.278) D53.2@248.104,-24.128 ; 247.752,-21.919 cw(c249.041,-21.919) D55.2@248.129,-21.008 ; 247.752,-19.737 ccw(c249.041,-19.737) D55.2@248.129,-20.648 ; J4.1@134.849,24.46 134.849,30.124 136.169,31.445 148.615,31.445 ; 145.872,-63.017 147.396,-64.541 164.795,-64.541 ; 148.615,31.445 191.999,31.445 194.737,34.183 239.172,34.183 247.752,25.603 247.752,-6.807 ; 164.795,-64.541 164.795,-61.29 ; 164.795,-64.541 187.198,-64.541 ; 187.198,-64.541 207.239,-64.541 ; 207.239,-64.541 239.928,-64.541 247.244,-57.226 ; 247.244,-57.226 247.752,-56.718 247.752,-22.581 ; 247.752,-22.581 247.752,-14.808 ; 247.752,-14.808 247.752,-6.807
  other v1: 227.33,-41.859 227.279,-33.833
PWM1: P37.4 U48.2 | length 69.3
  Top Layer w0.254: U48.2@184.988,-10.541 v1@186.766,-10.541 ; U48.2@185.81,-10.703 cw(c186.2,-11.093) 186.2,-10.541 cw(c186.2,-9.989) U48.2@185.81,-10.379 ; 186.035,-10.541 cw(c186.035,-11.374) v1@186.624,-10.785 ; 186.281,-10.541 ccw(c186.281,-10.055) v1@186.624,-10.399 ; v1@192.43,-10.566 192.43,-10.523 193.167,-9.786 193.167,-4.445 v1(194.183,-3.429) ; v1@192.456,-10.319 ccw(c192.456,-9.888) 192.761,-10.192 ; v1@192.729,-10.592 cw(c193.616,-10.592) 192.989,-9.965 ; v1@193.91,-3.429 cw(c193.251,-3.429) 193.717,-3.895 cw(c194.183,-4.361) v1@194.183,-3.702 ; v1@207.01,-1.016 208.407,-1.016 209.906,0.483 209.906,18.796 210.871,19.761 210.871,22.149 P37.4@212.115,23.393 ; v1@207.203,-1.234 cw(c207.73,-1.762) 207.73,-1.016 ; v1@207.203,-0.848 ccw(c207.608,-0.444) 207.608,-1.016 ; P37.4@211.492,23.393 cw(c209.988,23.393) 211.052,22.33 cw(c212.115,21.266) P37.4@212.115,22.77 ; P37.4@211.746,23.393 cw(c210.856,23.393) 211.485,22.763 cw(c212.115,22.134) P37.4@212.115,23.024
  Bottom Layer w0.254: v1(186.817,-10.592) v1(192.456,-10.592) ; v1@187.01,-10.785 cw(c187.476,-11.251) 187.476,-10.592 cw(c187.476,-9.933) v1@187.01,-10.399 ; v1@192.263,-10.785 ccw(c191.797,-11.251) 191.797,-10.592 ccw(c191.797,-9.933) v1@192.263,-10.399 ; v1(194.183,-3.429) 196.571,-1.041 v1(207.01,-1.041) ; v1@194.183,-3.156 ccw(c194.183,-2.497) 194.649,-2.963 ccw(c195.115,-3.429) v1@194.456,-3.429 ; v1@206.817,-1.234 ccw(c206.351,-1.7) 206.351,-1.041 ccw(c206.351,-0.382) v1@206.817,-0.848
PWM2: P37.3 U52.3 | length 74
  Top Layer w0.254: U52.3@184.988,-16.485 v1@186.538,-16.485 ; U52.3@185.81,-16.646 cw(c186.2,-17.036) 186.2,-16.485 cw(c186.2,-15.933) U52.3@185.81,-16.323 ; U52.3@185.843,-16.485 cw(c185.843,-17.23) v1@186.37,-16.703 ; U52.3@185.965,-16.485 ccw(c185.965,-15.912) v1@186.37,-16.317 ; 186.04,-16.442 ccw(c186.117,-16.155) v1@186.349,-16.34 ; 186.07,-16.45 cw(c185.961,-16.858) v1@186.327,-16.646 ; 186.123,-16.505 cw(c186.162,-16.653) v1@186.306,-16.602 ; v1(192.761,-16.51) 194.183,-15.088 v1(194.183,-4.699) ; v1@192.761,-16.237 ccw(c192.761,-15.578) 193.227,-16.044 ccw(c193.693,-16.51) v1@193.034,-16.51 ; v1@193.99,-4.892 cw(c193.524,-5.358) 194.183,-5.358 cw(c194.842,-5.358) v1@194.376,-4.892 ; v1@207.01,-2.032 208.864,-2.032 210.414,-0.483 210.414,17.225 212.115,18.926 P37.3@212.115,20.853 ; v1@207.228,-2.25 cw(c207.756,-2.778) 207.756,-2.032 ; v1@207.228,-1.864 ccw(c207.633,-1.46) 207.633,-2.032 ; P37.3@211.675,20.413 cw(c210.611,19.349) 212.115,19.349 cw(c213.619,19.349) P37.3@212.556,20.413 ; P37.3@211.854,20.592 cw(c211.225,19.963) 212.115,19.963 cw(c213.006,19.963) P37.3@212.376,20.592
  Bottom Layer w0.254: v1(186.563,-16.51) v1(192.761,-16.51) ; v1@186.756,-16.703 cw(c187.222,-17.169) 187.222,-16.51 cw(c187.222,-15.851) v1@186.756,-16.317 ; v1@192.568,-16.703 ccw(c192.102,-17.169) 192.102,-16.51 ccw(c192.102,-15.851) v1@192.568,-16.317 ; v1(194.183,-4.699) 196.844,-2.038 207.016,-2.038 v1(207.035,-2.057) ; v1@194.183,-4.426 ccw(c194.183,-3.767) 194.649,-4.233 ccw(c195.115,-4.699) v1@194.456,-4.699 ; 206.33,-2.038 cw(c206.33,-2.762) v1@206.842,-2.25 ; 206.422,-2.038 ccw(c206.422,-1.444) v1@206.842,-1.864
PWM3: P37.2 U48.3 | length 66.6
  Top Layer w0.254: U48.3@184.988,-9.271 v1@186.766,-9.271 ; U48.3@185.81,-9.433 cw(c186.2,-9.823) 186.2,-9.271 cw(c186.2,-8.719) U48.3@185.81,-9.109 ; 186.035,-9.271 cw(c186.035,-10.104) v1@186.624,-9.515 ; 186.281,-9.271 ccw(c186.281,-8.785) v1@186.624,-9.129 ; v1@192.176,-9.049 ccw(c192.176,-8.39) 192.642,-8.856 ccw(c193.108,-9.322) v1@192.449,-9.322 ; v1@192.202,-9.296 192.659,-8.839 192.659,-3.835 v1(194.183,-2.311) ; v1@193.91,-2.311 cw(c193.251,-2.311) 193.717,-2.777 cw(c194.183,-3.243) v1@194.183,-2.584 ; v1@207.01,1.27 208.305,1.27 208.89,1.854 208.89,18.872 208.255,19.507 208.255,22.073 P37.2@209.575,23.393 ; v1@207.203,1.102 cw(c207.608,0.698) 207.608,1.27 ; v1@207.203,1.488 ccw(c207.73,2.016) 207.73,1.27 ; P37.2@208.952,23.393 cw(c207.448,23.393) 208.512,22.33 cw(c209.575,21.266) P37.2@209.575,22.77 ; P37.2@209.206,23.393 cw(c208.316,23.393) 208.945,22.763 cw(c209.575,22.134) P37.2@209.575,23.024
  Bottom Layer w0.254: v1(186.817,-9.322) v1(192.176,-9.322) ; v1@187.01,-9.515 cw(c187.476,-9.981) 187.476,-9.322 cw(c187.476,-8.663) v1@187.01,-9.129 ; v1@191.983,-9.515 ccw(c191.517,-9.981) 191.517,-9.322 ccw(c191.517,-8.663) v1@191.983,-9.129 ; v1(194.183,-2.311) 197.79,1.295 v1(207.01,1.295) ; v1@194.183,-2.038 ccw(c194.183,-1.379) 194.649,-1.845 ccw(c195.115,-2.311) v1@194.456,-2.311 ; v1@206.817,1.102 ccw(c206.351,0.636) 206.351,1.295 ccw(c206.351,1.954) v1@206.817,1.488
PWM4: P37.1 U52.2 | length 75.1
  Top Layer w0.254: U52.2@184.988,-17.755 v1@186.614,-17.755 ; U52.2@185.81,-17.916 cw(c186.2,-18.306) 186.2,-17.755 cw(c186.2,-17.203) U52.2@185.81,-17.593 ; U52.2@185.919,-17.755 ccw(c185.919,-17.009) v1@186.446,-17.536 ; 186.041,-17.755 cw(c186.041,-18.327) v1@186.446,-17.922 ; v1@198.054,-17.536 ccw(c197.588,-17.07) 198.247,-17.07 ccw(c198.906,-17.07) v1@198.44,-17.536 ; v1@198.054,-0.091 cw(c197.588,-0.557) 198.247,-0.557 cw(c198.906,-0.557) v1@198.44,-0.091 ; v1(198.247,-17.729) v1(198.247,0.102) ; v1@207.01,0.127 208.331,0.127 209.398,1.194 209.398,20.676 P37.1@209.575,20.853 ; v1@207.203,-0.091 cw(c207.73,-0.619) 207.73,0.127 ; v1@207.203,0.295 ccw(c207.608,0.699) 207.608,0.127 ; P37.1@209.135,20.413 cw(c208.501,19.779) 209.398,19.779 ; 209.398,18.92 cw(c211.509,18.92) P37.1@210.016,20.413 ; 209.398,19.533 cw(c210.895,19.533) P37.1@209.836,20.592
  Bottom Layer w0.254: v1(186.639,-17.729) v1(198.247,-17.729) ; v1@186.832,-17.922 cw(c187.298,-18.388) 187.298,-17.729 cw(c187.298,-17.07) v1@186.832,-17.536 ; v1@198.054,-17.922 ccw(c197.588,-18.388) 197.588,-17.729 ccw(c197.588,-17.07) v1@198.054,-17.536 ; v1(198.247,0.102) v1(207.01,0.102) ; v1@198.44,-0.091 cw(c198.906,-0.557) 198.906,0.102 cw(c198.906,0.761) v1@198.44,0.295 ; v1@206.817,-0.091 ccw(c206.351,-0.557) 206.351,0.102 ccw(c206.351,0.761) v1@206.817,0.295
PWM11: P49.4 R121.2 U48.7 | length 64.2
  Top Layer w0.254: R121.2@176.018,-11.325 ccw(c175.151,-10.458) 176.378,-10.458 ccw(c177.604,-10.458) R121.2@176.737,-11.325 ; v1@176.148,-10.333 cw(c175.497,-10.752) 176.245,-10.953 ; v1@176.185,-10.378 cw(c175.719,-10.844) 176.378,-10.844 cw(c177.037,-10.844) v1@176.571,-10.378 ; v1@176.241,-10.422 cw(c176.032,-10.784) 176.436,-10.676 ; 176.319,-10.676 cw(c176.723,-10.784) v1@176.514,-10.422 ; v1(176.378,-10.185) R121.2@176.378,-11.684 177.8,-11.684 178.943,-10.541 U48.7@179.908,-10.541 ; 176.51,-10.953 cw(c177.259,-10.752) v1@176.607,-10.333 ; R121.2@176.864,-12.043 cw(c177.731,-12.91) 177.731,-11.684 cw(c177.731,-10.458) R121.2@176.864,-11.325 ; 178.337,-11.147 cw(c179.248,-12.057) U48.7@179.248,-10.77 ; 178.771,-10.713 cw(c179.248,-11.19) U48.7@179.248,-10.516
  Bottom Layer w0.254: P49.4@134.933,-13.183 160.757,-13.183 163.754,-10.185 v1(176.378,-10.185) ; P49.4@135.107,-12.841 ccw(c135.933,-12.015) 135.933,-13.183 ; P49.4@135.286,-13.536 cw(c136.14,-14.39) 136.14,-13.183 ; P49.4@135.286,-12.661 ccw(c136.546,-11.401) 136.546,-13.183 ; P49.4@135.466,-13.716 cw(c136.753,-15.003) 136.753,-13.183 ; P49.4@135.466,-12.481 ccw(c137.159,-10.788) 137.159,-13.183 ; v1@176.185,-10.378 ccw(c175.719,-10.844) 175.719,-10.185 ccw(c175.719,-9.526) v1@176.185,-9.992
PWM22: P51.4 R132.1 U52.6 | length 79.2
  Top Layer w0.254: v1(162.687,-31.877) 163.195,-31.369 v1(163.195,-21.59) ; v1@162.687,-31.604 ccw(c162.687,-30.945) 163.153,-31.411 ccw(c163.619,-31.877) v1@162.96,-31.877 ; v1@163.002,-21.783 cw(c162.536,-22.249) 163.195,-22.249 cw(c163.854,-22.249) v1@163.388,-21.783 ; R132.1@176.018,-15.701 cw(c175.151,-16.568) 176.378,-16.568 cw(c177.604,-16.568) R132.1@176.737,-15.701 ; v1@176.147,-16.592 ccw(c175.547,-16.212) 176.233,-16.029 ; v1@176.185,-16.546 ccw(c175.719,-16.08) 176.378,-16.08 ccw(c177.037,-16.08) v1@176.571,-16.546 ; v1@176.241,-16.502 ccw(c175.987,-16.062) 176.478,-16.194 ; 176.277,-16.194 ccw(c176.768,-16.062) v1@176.514,-16.502 ; v1(176.378,-16.739) R132.1@176.378,-15.342 ; R132.1@176.403,-15.367 R132.1@176.378,-15.342 ; 176.522,-16.029 ccw(c177.208,-16.212) v1@176.608,-16.592 ; R132.1@176.882,-15.682 cw(c177.648,-16.373) 177.648,-15.342 ; R132.1@176.882,-15.001 ccw(c177.648,-14.31) 177.648,-15.342 ; 178.077,-15.771 ccw(c179.248,-14.6) U52.6@179.248,-16.256 ; 178.511,-16.205 ccw(c179.248,-15.468) U52.6@179.248,-16.51 ; U52.6@179.065,-16.622 ccw(c178.791,-16.827) 178.791,-16.485 ; U52.6@179.065,-16.347 cw(c178.791,-16.142) 178.791,-16.485 ; U52.6@179.908,-16.485 178.791,-16.485 ; R132.1@176.378,-15.342 177.648,-15.342 ; 177.648,-15.342 178.791,-16.485
  Bottom Layer w0.254: P51.4@134.849,-31.878 v1(162.687,-31.877) ; P51.4@135.286,-32.316 cw(c136.345,-33.375) 136.345,-31.877 ; P51.4@135.286,-31.44 ccw(c136.341,-30.386) 136.341,-31.877 ; P51.4@135.466,-32.495 cw(c136.959,-33.988) 136.959,-31.877 ; P51.4@135.466,-31.261 ccw(c136.954,-29.773) 136.954,-31.877 ; v1@162.494,-32.07 ccw(c162.028,-32.536) 162.028,-31.877 ccw(c162.028,-31.218) v1@162.494,-31.684 ; v1(163.195,-21.59) 168.046,-16.739 v1(176.378,-16.739) ; v1@163.195,-21.317 ccw(c163.195,-20.658) 163.661,-21.124 ccw(c164.127,-21.59) v1@163.468,-21.59 ; v1@176.185,-16.932 ccw(c175.719,-17.398) 175.719,-16.739 ccw(c175.719,-16.08) v1@176.185,-16.546